# Altium PCB PCB_plata.PcbDoc
Units mm, origin at the board's own origin, x right, y up, seen from the top; angles counter-clockwise.
Board outline 115.57 x 101.6 mm, 2 copper layers (Top Layer, Bottom Layer); 56 components, 39 nets, 249 pads, 16 vias.
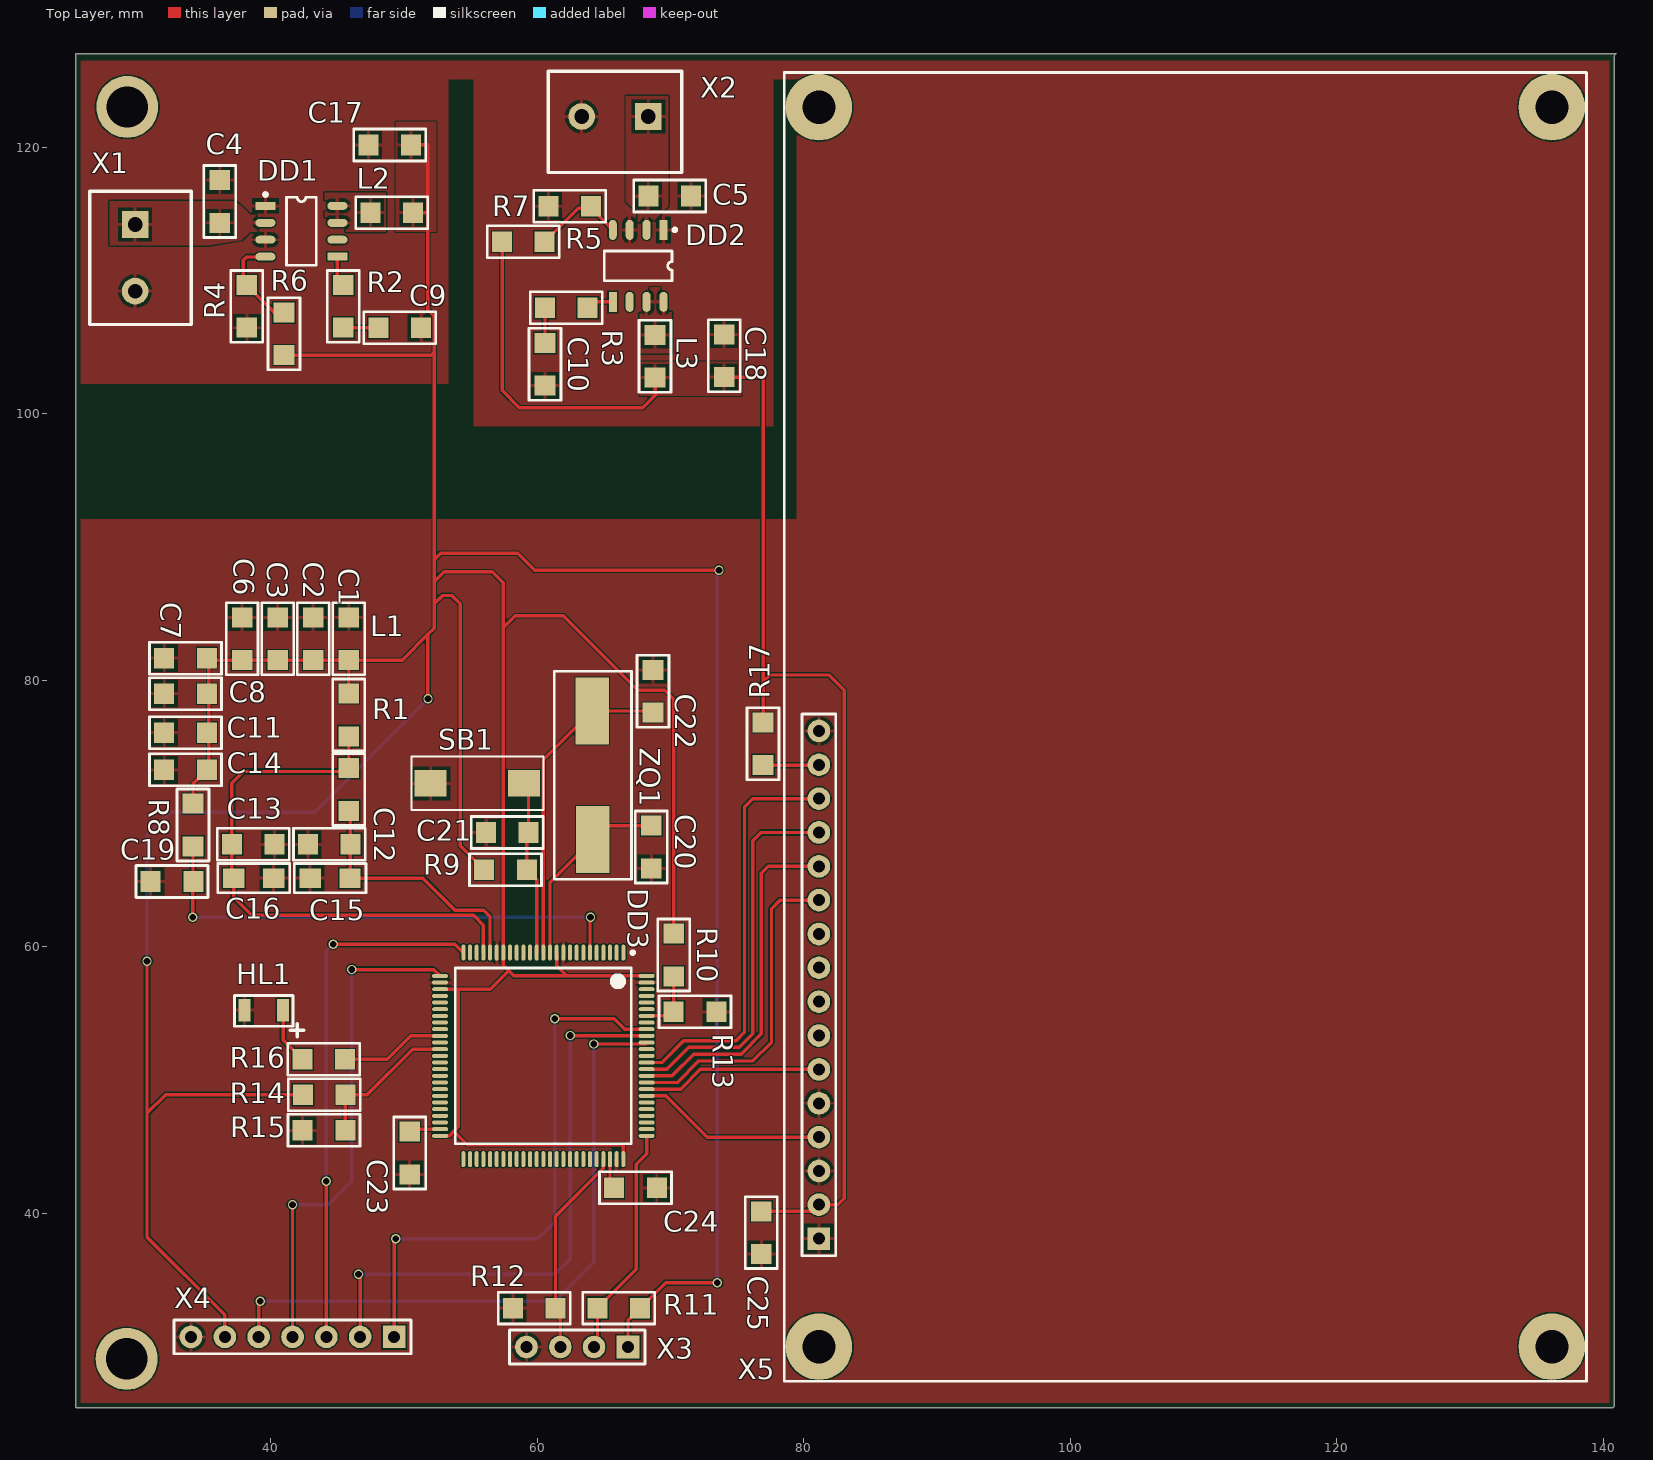
[diagram p0: Top Layer view]
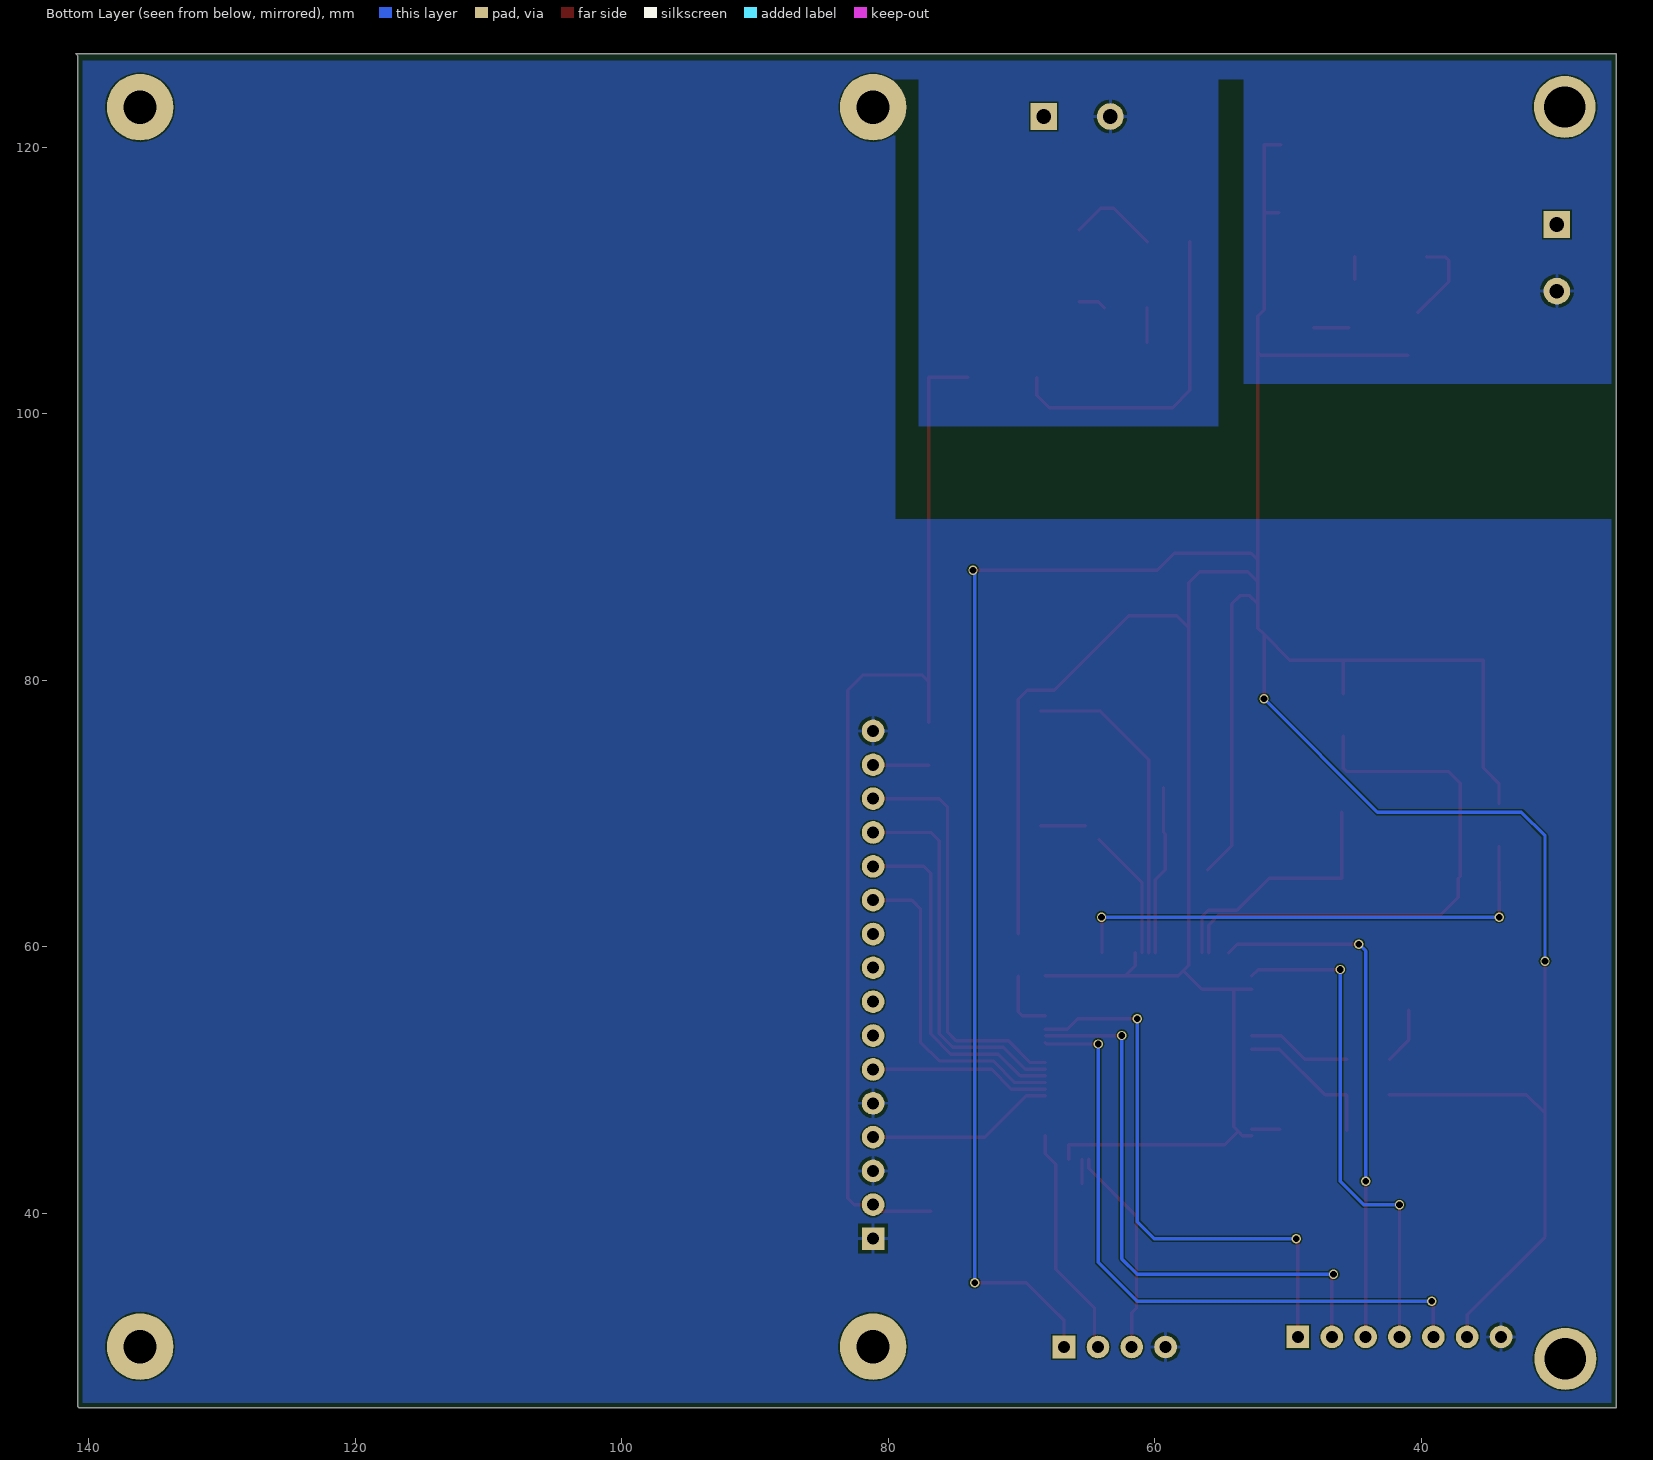
[diagram p1: Bottom Layer view, seen from below]
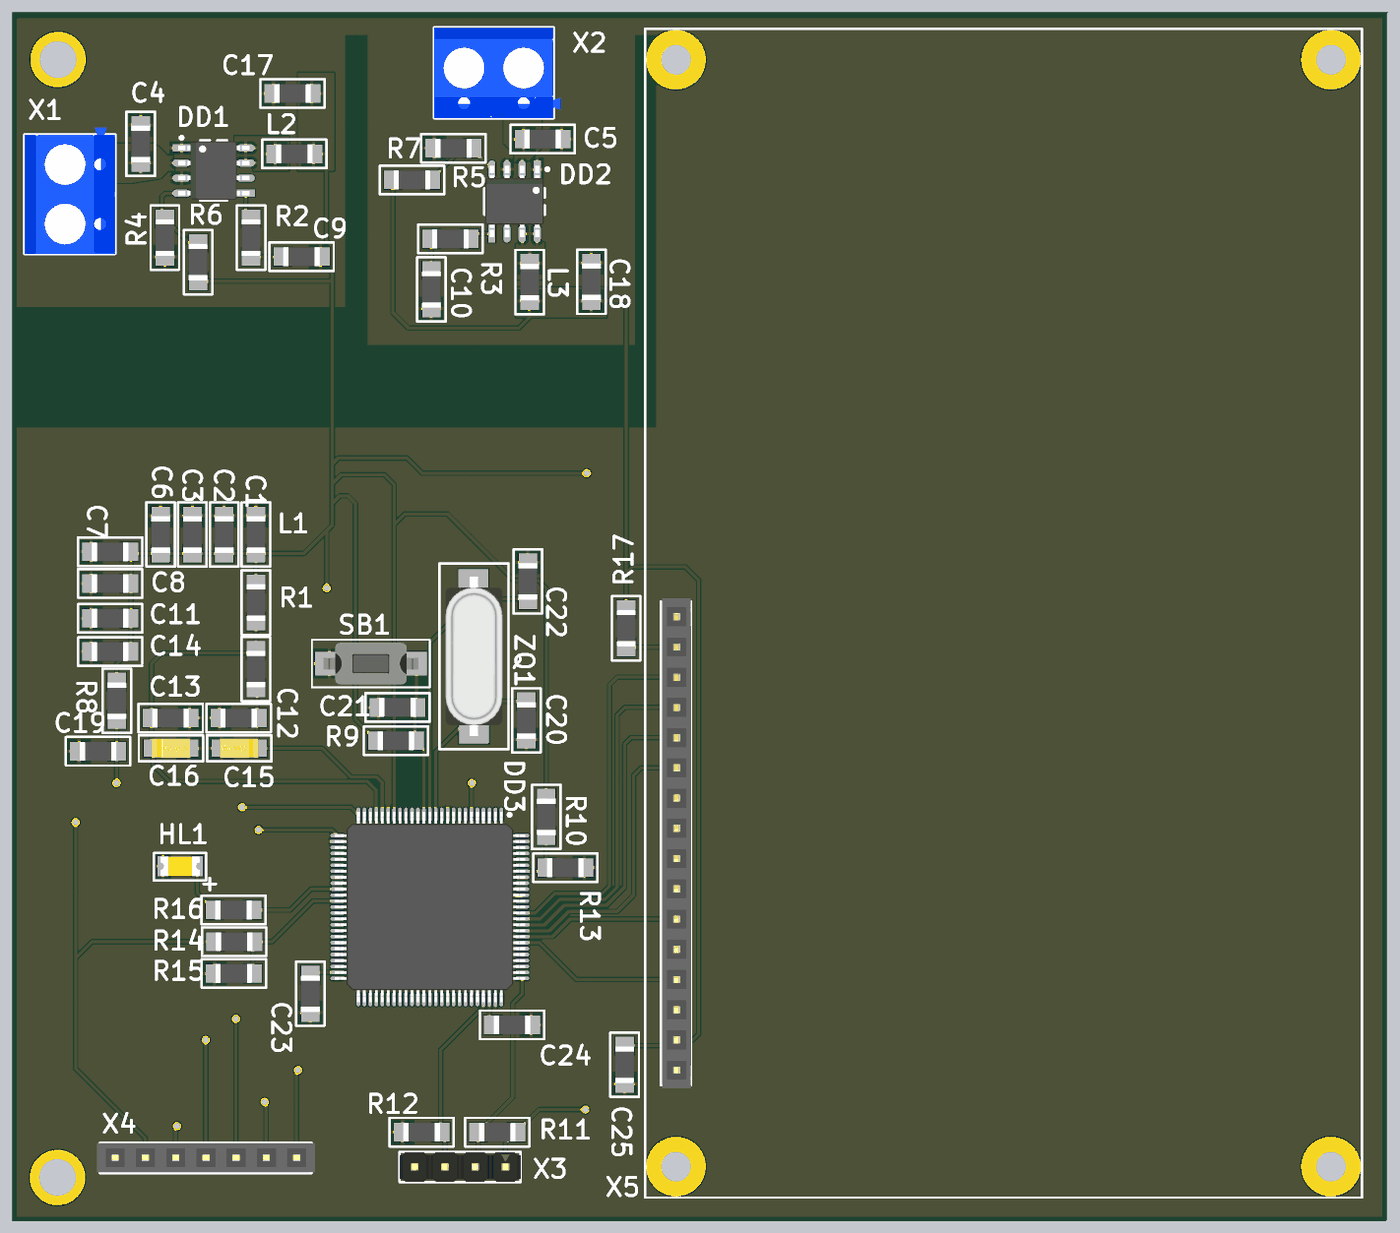
[diagram p2: 3D render of the assembled board from above, using the file's embedded part models]

## Layer stack, top to bottom
Top Solder: solder mask 0.0102, Solder Resist, Dk 3.5
Top Layer: signal copper 0.0356
Dielectric 1: dielectric 0.32, FR-4, Dk 4.8
Bottom Layer: signal copper 0.0356
Bottom Solder: solder mask 0.0102, Solder Resist, Dk 3.5

## Board outline
25.4,25.4 140.716,25.4 140.843,25.527 140.843,126.873 140.97,127 25.4,127

## Design rules (kind name [scope] priority, off if disabled: settings)
Clearance [All] p1: gap=0.1
HoleToHoleClearance [All] p1: gap=0.1 allowstackedmicrovias=TRUE
MinimumSolderMaskSliver [All] p1: minsoldermaskwidth=0.1
PolygonConnect [All] p1: connectstyle=Relief reliefconductorwidth=0.254 reliefentries=4 polygonreliefangle="90 Angle" airgapwidth=0.254
RoutingVias [All] p1: holewidth=0.5 width=0.7 viastyle="Through Hole" minholewidth=0.1 minwidth=0.5 maxholewidth=0.711 maxwidth=1.27
SilkToSilkClearance [All] p1: silktosilkclearance=0.1
SilkToSolderMaskClearance [IsPad] p1: minsilkscreentomaskgap=0.1 clearancetoexposedcopper=TRUE
SolderMaskExpansion [All] p1: expansion=0.05
UnpouredPolygon [All] p1: allowunpoured=FALSE
Width [All] p1: maxlimit=0.254 minlimit=0.1 preferedwidth=0.2
25 further rules are at their usual default settings.

## Components (designator, comment, footprint, x,y, rotation, side; value= is the part's Value field where it differs from the comment)
C1 "100nF" R1206 45.872,84.709 r270 top
C2 "C" R1206 43.205,84.709 r270 top
C3 "C" R1206 40.538,84.709 r270 top
C4 "2.2uF" R1206 36.195,114.325 r90 top
C5 "2.2uF" R1206 68.351,116.332 r0 top
C6 "C" R1206 37.871,84.709 r270 top
C7 "C" R1206 32.029,81.661 r0 top
C8 "C" R1206 32.029,78.994 r0 top
C9 "1.5nF" R1206 51.308,106.451 r180 top
C10 "1.5nF" R1206 60.604,102.108 r90 top
C11 "C" R1206 32.029,76.073 r0 top
C12 "1uF" R1206 42.824,67.691 r0 top
C13 "1uF" R1206 37.109,67.691 r0 top
C14 "C" R1206 32.029,73.279 r0 top
C15 "100nF" Rc3216 45.974,65.151 r180 top
C16 "100nF" Rc3216 37.236,65.151 r0 top
C17 "22uF" R1206 50.546,120.167 r180 top
C18 "22uF" R1206 74.041,102.743 r90 top
C19 "1uF" R1206 31.013,64.897 r0 top
C20 "20pF" R1206 68.58,65.888 r90 top
C21 "100nF" R1206 56.159,68.58 r0 top
C22 "20pF" R1206 68.707,80.772 r270 top
C23 "2.2uF" R1206 50.444,42.926 r90 top
C24 "2.2uF" R1206 68.986,41.91 r180 top
C25 "100nF" R1206 76.835,36.957 r90 top
DD1 "APW7142" APW7142 39.624,115.595 r0 top
DD2 "APW7142" APW7142 69.494,113.792 r270 top
DD3 "STM32F4" STM32F4xx 60.477,51.816 r270 top
HL1 "Led" LED 39.497,55.245 r180 top
L1 "4.7uH" R1206 45.872,78.994 r270 top
L2 "4.7uH" R1206 47.498,115.087 r0 top
L3 "6.8uH" R1206 68.859,105.918 r270 top
R1 "47" R1206 45.872,73.406 r270 top
R2 "10k" R1206 45.466,106.451 r90 top
R3 "10k" R1206 60.604,107.95 r0 top
R4 "15k" R1206 38.227,106.451 r90 top
R5 "12k" R1206 60.858,115.57 r0 top
R6 "46.9k" R1206 41.021,107.594 r270 top
R7 "63k" R1206 60.579,112.903 r180 top
R8 "Res" R1206 34.188,70.739 r270 top
R9 "100k" R1206 56.032,65.786 r0 top
R10 "Res" R1206 70.256,57.785 r90 top
R11 "Res" R1206 64.541,32.893 r0 top
R12 "Res" R1206 58.191,32.893 r0 top
R13 "Res" R1206 70.256,55.118 r0 top
R14 "Res" R1206 42.443,48.895 r0 top
R15 "Res" R1206 45.618,46.228 r180 top
R16 "Res" R1206 45.593,51.562 r180 top
R17 "100" R1206 76.962,76.835 r270 top
SB1 "BUTTON" RESET_BUTTON 55.524,72.263 r270 top
X1 "DG301" DG301 29.845,114.198 r270 top
X2 "DG301" DG301 68.351,122.301 r180 top
X3 "PLS-4" PLS4 66.827,29.972 r180 top
X4 "PBS-7" PBS7 49.276,30.734 r180 top
X5 "PBS16" PBS16 81.153,38.1 r90 top
ZQ1 "KR" HC-49SM 64.135,72.873 r270 top

## Footprints (in the part's own frame and the unit in brackets; to place one, negate y for a bottom-side part, rotate by r counter-clockwise, add the part's x,y. Pads: shape width x height; smd on the part's side, far side on the other; paste and mask are expansions set on the pad)
APW7142 [mm]
  rect 1.5x0.6 smd: 1(0,0) 5(5.4,-3.81)
  oval 1.5x0.6 smd: 2(0,-1.27) 3(0,-2.54) 4(0,-3.81) 6(5.4,-2.54) 7(5.4,-1.27) 8(5.4,0)
  silkscreen extent -0.12,-4.44 3.82,0.97, body extent -0.3,-4.35 5.7,0.55, height 1.75
DG301 [mm]
  rect 2x2 hole 1.1: 1(0,0)
  round 2 hole 1.1: 2(5,0)
  silkscreen extent -2.5,-3.4 7.5,4.2, body extent -3.1,-3.4 7.5,4.2, height 3.73
HC-49SM [mm]
  rect 5x2.5 smd: 1(-4.825,0) 2(4.825,0.05)
  silkscreen extent -7.8,-2.85 7.8,2.95, body extent -6.7,-2.35 6.7,2.45, height 4
LED [mm]
  rect 0.9x1.7 smd: 1(-1.45,0) 2(1.45,0)
  silkscreen extent -3,-1.1 2.2,2, body extent -1.65,-0.8 1.65,0.8, height 1.4
PBS7 [mm]
  rect 1.7x1.7 hole 0.9: 1(0,0)
  round 1.7 hole 0.9: 2(2.55,0) 3(5.08,0) 4(7.62,0) 5(10.16,0) 6(12.7,0) 7(15.24,0)
  silkscreen extent -1.28,-1.27 16.51,1.28, body extent -1.56,-1.24 16.76,1.22, height 8.48
PBS16 [mm]
  round 5 hole 2.5: 0(-8.1,0) 0(-8.1,-55) 0(84.9,-55) 0(84.9,0)
  rect 1.7x1.7 hole 0.9: 1(0,0)
  round 1.7 hole 0.9: 2(2.55,0) 3(5.08,0) 4(7.62,0) 5(10.16,0) 6(12.7,0) 7(15.24,0) 8(17.78,0) 9(20.33,0) 10(22.86,0) 11(25.4,0) 12(27.94,0) 13(30.48,0) 14(33.02,0) 15(35.56,0) 16(38.1,0)
  silkscreen extent -10.7,-57.6 87.5,2.6, body extent -1.54,-1.27 39.64,1.19, height 8.48
PLS4 [mm]
  rect 1.7x1.7 hole 0.9: 1(0,0)
  round 1.7 hole 0.9: 2(2.55,0) 3(5.08,0) 4(7.62,0)
  silkscreen extent -1.28,-1.27 8.89,1.28, body extent -1.27,-1.25 8.89,1.25, height 8.55
R1206 [mm]
  rect 1.5x1.55 smd: 1(0,0) 2(3.2,0)
  silkscreen extent -1.1,-1.2 4.3,1.2, body extent 0.05,-0.8 3.15,0.8, height 0.65
Rc3216 [mm]
  rect 1.6x1.45 smd: 1(0,0) 2(3,0)
  silkscreen extent -1.2,-1.1 4.2,1.1, body extent -0.1,-0.8 3.1,0.8, height 1.6
RESET_BUTTON [mm]
  rect 2x2.4 smd: 1(0,3.5) 2(0,-3.5)
  silkscreen extent -2,-4.95 2,4.95, body extent -1.75,-4 1.75,4, height 5.5
STM32F4xx [mm]
  oval 1.2x0.3 smd: 1(-7.75,6) 2(-7.75,5.5) 3(-7.75,5) 4(-7.75,4.5) 5(-7.75,4) 6(-7.75,3.5) 7(-7.75,3) 8(-7.75,2.5) 9(-7.75,2) 10(-7.75,1.5) 11(-7.75,1) 12(-7.75,0.5) 13(-7.75,0) 14(-7.75,-0.5) 15(-7.75,-1) 16(-7.75,-1.5) 17(-7.75,-2) 18(-7.75,-2.5) 19(-7.75,-3) 20(-7.75,-3.5) 21(-7.75,-4) 22(-7.75,-4.5) 23(-7.75,-5) 24(-7.75,-5.5) 25(-7.75,-6) 51(7.75,-6) 52(7.75,-5.5) 53(7.75,-5) 54(7.75,-4.5) 55(7.75,-4) 56(7.75,-3.5) 57(7.75,-3) 58(7.75,-2.5) 59(7.75,-2) 60(7.75,-1.5) 61(7.75,-1) 62(7.75,-0.5) 63(7.75,0) 64(7.75,0.5) 65(7.75,1) 66(7.75,1.5) 67(7.75,2) 68(7.75,2.5) 69(7.75,3) 70(7.75,3.5) 71(7.75,4) 72(7.75,4.5) 73(7.75,5) 74(7.75,5.5) 75(7.75,6)
  oval 0.3x1.2 smd: 26(-6,-7.75) 27(-5.5,-7.75) 28(-5,-7.75) 29(-4.5,-7.75) 30(-4,-7.75) 31(-3.5,-7.75) 32(-3,-7.75) 33(-2.5,-7.75) 34(-2,-7.75) 35(-1.5,-7.75) 36(-1,-7.75) 37(-0.5,-7.75) 38(0,-7.75) 39(0.5,-7.75) 40(1,-7.75) 41(1.5,-7.75) 42(2,-7.75) 43(2.5,-7.75) 44(3,-7.75) 45(3.5,-7.75) 46(4,-7.75) 47(4.5,-7.75) 48(5,-7.75) 49(5.5,-7.75) 50(6,-7.75) 76(6,7.75) 77(5.5,7.75) 78(5,7.75) 79(4.5,7.75) 80(4,7.75) 81(3.5,7.75) 82(3,7.75) 83(2.5,7.75) 84(2,7.75) 85(1.5,7.75) 86(1,7.75) 87(0.5,7.75) 88(0,7.75) 89(-0.5,7.75) 90(-1,7.75) 91(-1.5,7.75) 92(-2,7.75) 93(-2.5,7.75) 94(-3,7.75) 95(-3.5,7.75) 96(-4,7.75) 97(-4.5,7.75) 98(-5,7.75) 99(-5.5,7.75) 100(-6,7.75)
  silkscreen extent -7.87,-6.6 6.6,6.83, body extent -8,-8 8,8, height 1.59

## Part data
C1 C4 C5 C9 C10 C12 C13 C17 C18 C19 C20 C21 C22 C23 C24 C25: library part C
C15 C16: library part C+
L1 L2 L3: library part L
R1 R2 R3 R4 R5 R6 R7 R9 R17: library part Res
X5: library part Wh1602C

## Free pads (board coordinates)
  round 4.65 hole 3.1: 0(29.21,29.083) 0(29.254,123.016)

## Via types
v1: diameter 0.7, hole 0.5, Top Layer to Bottom Layer, 16 vias

## Nets (pads, with @x,y where several pads share a name; then routed paths per layer and width w, separated by ;. In a path a pad name is that pad's centre, name@x,y a point inside that pad or via, vN(x,y) a via of type N, cw(c..) or ccw(c..) an arc to the next point about the centre after c; other vN are vias at no path point)
3.3V: C1.2 C2.2 C3.2 C6.2 C7.2 C8.2 C11.2 C14.2 C17.1 DD3.11 DD3.19 DD3.28 DD3.50 DD3.75 DD3.100 L1.1 L2.2 R6.2 R8.1 R9.1 R10.2 R11.2 R14.1 X3.1 X4.6 | length 385.7
  Top Layer w0.254: v1(30.734,58.928) 30.734,47.498 ; R8.1 34.188,72.238 C14.2 35.381,73.431 35.381,81.509 C6.2 C3.2 C2.2 C1.2 ; X4.6 36.576,32.385 30.734,38.227 30.734,47.498 ; R6.2 52.07,104.394 52.285,104.609 ; R14.1 32.131,48.895 30.734,47.498 ; L1.1 C1.2 ; C17.1 51.791,120.167 51.791,115.087 ; L2.2 51.791,115.087 ; v1(51.816,78.613) 51.816,83.439 ; DD3.50 53.436,45.816 53.769,46.149 ; DD3.28 54.102,56.816 ; R9.1 54.229,67.589 54.229,85.725 53.594,86.36 52.92,86.36 52.285,85.725 ; DD3.11 61.477,58.569 62.23,57.816 ; DD3.75 66.477,45.156 54.762,45.156 53.769,46.149 ; X3.1 66.827,31.979 R11.2 69.646,34.798 v1(73.533,34.798) ; DD3.100 62.23,57.816 ; R10.2 70.256,78.588 69.596,79.248 67.564,79.248 61.976,84.836 58.366,84.836 57.477,83.947 ; v1(73.66,88.265) 59.817,88.265 58.547,89.535 52.793,89.535 52.285,89.027 ; C1.2 49.886,81.509 51.816,83.439 ; 51.791,115.087 51.791,107.814 52.285,107.32 52.285,104.609 ; 51.816,83.439 52.285,83.908 52.285,85.725 ; 52.285,85.725 52.285,87.376 ; 52.285,87.376 52.285,89.027 ; 52.285,87.376 53.047,88.138 56.642,88.138 57.477,87.303 57.477,83.947 ; 52.285,89.027 52.285,104.609 ; 53.769,46.149 54.102,46.482 54.102,56.816 ; 54.102,56.816 56.477,56.816 57.87,58.208 ; 57.477,83.947 DD3.19 57.477,58.601 57.87,58.208 ; 57.87,58.208 58.262,57.816 62.23,57.816
  Bottom Layer w0.254: v1(30.734,58.928) 30.734,68.326 32.512,70.104 43.307,70.104 v1(51.816,78.613) ; v1(73.533,34.798) v1@73.533,88.138
5V: C18.1 C25.2 L3.2 R7.2 R17.1 X5.2 | length 105.2
  Top Layer w0.254: R7.2 57.379,101.752 58.674,100.457 67.945,100.457 68.859,101.371 L3.2 ; C18.1 76.962,102.743 76.962,79.883 ; C25.2 80.66,40.157 X5.2 82.56,40.65 83.058,41.148 83.058,79.248 81.915,80.391 77.47,80.391 76.962,79.883 ; R17.1 76.962,79.883
AUX: DD3.90 X4.5 | length 49.2
  Top Layer w0.254: X4.5 v1@39.116,33.274 ; v1(64.262,52.705) 68.116,52.705 DD3.90
  Bottom Layer w0.254: v1(39.243,33.401) 61.341,33.401 64.262,36.322 v1(64.262,52.705)
BOOT0: DD3.94 R10.1 R13.1 | length 4.8
  Top Layer w0.254: DD3.94 69.954,54.816 R13.1 R10.1
BOOT1: DD3.37 R14.2 R15.1 | length 11.1
  Top Layer w0.254: R15.1 R14.2@45.618,48.87 ; R14.2 47.244,48.895 50.665,52.316 DD3.37
DB4: DD3.84 X5.11 | length 24.5
  Top Layer w0.254: DD3.84 70.517,49.816 72.136,51.435 76.2,51.435 77.597,52.832 77.597,62.865 78.232,63.5 X5.11
DB5: DD3.85 X5.12 | length 26.5
  Top Layer w0.254: DD3.85 70.128,50.316 71.755,51.943 75.311,51.943 76.835,53.467 76.835,65.532 77.343,66.04 X5.12
DB6: DD3.86 X5.13 | length 28.8
  Top Layer w0.254: DD3.86 69.739,50.816 71.374,52.451 75.184,52.451 76.2,53.467 76.2,67.945 76.835,68.58 X5.13
DB7: DD3.87 X5.14 | length 31
  Top Layer w0.254: DD3.87 69.35,51.316 70.993,52.959 74.93,52.959 75.565,53.594 75.565,70.485 76.2,71.12 X5.14
E: DD3.83 X5.6 | length 13.5
  Top Layer w0.254: DD3.83 70.779,49.316 72.263,50.8 X5.6
GND: C1.1 C2.1 C3.1 C4.2 C5.2 C6.1 C7.1 C8.1 C9.1 C10.1 C11.1 C12.1 C13.2 C14.1 C15.2 C16.2 C17.2 C18.2 C19.1 C20.1 C21.1 C22.1 C23.1 C24.1 C25.1 DD1.1 DD1.3 DD2.1 DD2.3 DD3.10 DD3.20 DD3.27 DD3.74 DD3.99 HL1.2 R4.1 R5.1 R12.1 R13.2 R15.2 SB1.2 X1.2 X2.2 X3.4 X4.7 X5.1 X5.3 X5.5 X5.16
LED: DD3.35 R16.1 | length 7.9
  Top Layer w0.254: R16.1 48.768,51.562 50.522,53.316 DD3.35
M0: DD3.92 X4.1 | length 42.2
  Top Layer w0.254: X4.1 v1@49.276,37.973 ; v1(61.341,54.61) 65.786,54.61 66.58,53.816 DD3.92
  Bottom Layer w0.254: v1(49.403,38.1) 60.071,38.1 61.341,39.37 v1(61.341,54.61)
M1: DD3.91 X4.2 | length 43.4
  Top Layer w0.254: X4.2 v1@46.726,35.316 ; v1(62.484,53.34) DD3.91@68.203,53.34
  Bottom Layer w0.254: v1(46.609,35.433) 61.341,35.433 62.484,36.576 v1(62.484,53.34)
NetC4_1: C4.1 DD1.2 X1.1
NetC5_1: C5.1 DD2.2 X2.1
NetC9_2: C9.2 R2.1 | length 2.6
  Top Layer w0.254: R2.1 C9.2
NetC10_2: C10.2 R3.1 | length 2.6
  Top Layer w0.254: C10.2 R3.1
NetC20_2: C20.2 DD3.12 ZQ1.2 | length 13.2
  Top Layer w0.254: DD3.12 60.977,64.84 ZQ1.2 ; ZQ1.2@65.225,69.088 C20.2
NetC21_2: C21.2 DD3.14 R9.2 SB1.1 | length 12.4
  Top Layer w0.254: R9.2 C21.2@59.232,68.453 ; R9.2@59.359,65.659 59.977,65.041 DD3.14 ; C21.2 SB1.1@59.359,71.928
NetC22_2: C22.2 DD3.13 ZQ1.1 | length 24.1
  Top Layer w0.254: DD3.13 60.477,74.04 ZQ1.1 C22.2@68.581,77.698
NetC23_2: C23.2 DD3.49 | length 2.1
  Top Layer w0.254: C23.2@50.634,46.316 DD3.49
NetC24_2: C24.2 DD3.73 | length 1.8
  Top Layer w0.254: C24.2@65.477,42.219 DD3.73
NetDD1_4: DD1.4 R4.2 R6.1 | length 6.6
  Top Layer w0.254: DD1.4 39.599,111.76 38.227,111.76 37.973,111.506 37.973,109.905 R4.2 R6.1@40.284,107.594
NetDD1_5: DD1.5 R2.2 | length 1.7
  Top Layer w0.254: R2.2@45.024,110.093 DD1.5
NetDD1_7: DD1.7 DD1.8 L2.1
NetDD2_4: DD2.4 R5.2 R7.1 | length 6.8
  Top Layer w0.254: R7.1 63.094,115.418 64.058,115.418 DD2.4
NetDD2_5: DD2.5 R3.2 | length 2.1
  Top Layer w0.254: R3.2 64.246,108.392 DD2.5
NetDD2_7: DD2.7 DD2.8 L3.1
NetHL1_1: HL1.1 R16.2 | length 4.3
  Top Layer w0.254: HL1.1 40.947,53.008 R16.2
NetR17_2: R17.2 X5.15 | length 4.2
  Top Layer w0.254: R17.2 X5.15@81.128,73.635
RS: DD3.82 X5.4 | length 14.2
  Top Layer w0.254: DD3.82 69.675,48.816 72.771,45.72 X5.4
RXD: DD3.25 X4.3 | length 39.7
  Top Layer w0.254: X4.3 v1(44.196,42.418) ; v1(44.704,60.198) 53.845,60.198 DD3.25
  Bottom Layer w0.254: v1(44.196,42.418) 44.196,59.69 v1(44.704,60.198)
SWCLK: DD3.76 R11.1 X3.2 | length 17.1
  Top Layer w0.254: X3.2@64.541,30.236 R11.1 64.541,32.918 67.437,35.814 67.437,43.688 68.227,44.478 DD3.76
SWDIO: DD3.72 R12.2 X3.3 | length 15.7
  Top Layer w0.254: X3.3 61.747,32.537 R12.2 61.391,39.801 64.977,43.387 DD3.72
TXD: DD3.26 X4.4 | length 37.8
  Top Layer w0.254: X4.4 v1(41.656,40.64) ; v1(46.101,58.293) 52.25,58.293 DD3.26
  Bottom Layer w0.254: v1(41.656,40.64) 44.323,40.64 46.101,42.418 v1(46.101,58.293)
VBAT: C19.2 DD3.6 R8.2 | length 37.8
  Top Layer w0.254: v1(34.163,62.23) C19.2@34.163,64.897 ; C19.2@34.188,64.922 R8.2 ; DD3.6 v1@63.977,62.199
  Bottom Layer w0.254: v1(34.163,62.23) v1(64.008,62.23)
VDDA: C13.1 C16.1 DD3.22 L1.2 R1.1 | length 41.7
  Top Layer w0.254: C16.1@37.109,65.278 C13.1 37.109,72.288 37.973,73.152 45.618,73.152 R1.1 L1.2 ; C16.1 37.236,63.729 38.608,62.357 55.245,62.357 55.977,61.625 DD3.22
VREF+: C12.2 C15.1 DD3.21 R1.2 | length 19.4
  Top Layer w0.254: R1.2@45.974,70.104 C15.1 51.435,65.151 53.848,62.738 56.007,62.738 56.477,62.268 DD3.21
pads on no net: DD1.6 DD2.6 DD3.1 DD3.2 DD3.3 DD3.4 DD3.5 DD3.7 DD3.8 DD3.9 DD3.15 DD3.16 DD3.17 DD3.18 DD3.23 DD3.24 DD3.29 DD3.30 DD3.31 DD3.32 DD3.33 DD3.34 DD3.36 DD3.38 DD3.39 DD3.40 DD3.41 DD3.42 DD3.43 DD3.44 DD3.45 DD3.46 DD3.47 DD3.48 DD3.51 DD3.52 DD3.53 DD3.54 DD3.55 DD3.56 DD3.57 DD3.58 DD3.59 DD3.60 DD3.61 DD3.62 DD3.63 DD3.64 DD3.65 DD3.66 DD3.67 DD3.68 DD3.69 DD3.70 DD3.71 DD3.77 DD3.78 DD3.79 DD3.80 DD3.81 DD3.88 DD3.89 DD3.93 DD3.95 DD3.96 DD3.97 DD3.98 X5.0 X5.7 X5.8 X5.9 X5.10

## Polygon pours and split planes (outlines as drawn)
NetC4_1 on Top Layer "V_IN" (solid, remove dead copper, pour order 16): 27.94,115.951 37.338,115.951 37.846,115.57 38.481,114.935 40.767,114.935 40.767,113.665 38.481,113.665 37.851,113.035 37.839,113.029 35.433,112.649 32.893,112.649 27.94,112.649 27.94,113.03 27.94,115.57
NetC5_1 on Top Layer "V_IN" (solid, remove dead copper, pour order 14): 69.85,123.825 69.85,116.459 69.85,115.697 69.85,115.57 68.834,114.554 68.834,112.649 67.564,112.649 67.564,114.681 67.564,115.062 66.929,115.697 66.675,115.951 66.675,123.825
5V on Top Layer "V_OUT" (solid, remove dead copper, pour order 12): 67.691,101.346 67.691,103.886 75.311,103.886 75.311,101.346
NetDD2_7 on Top Layer "V_LX" (solid, remove dead copper, pour order 11): 67.691,109.474 70.104,109.474 70.104,104.521 67.691,104.521
3.3V on Top Layer "V_OUT" (solid, remove dead copper, pour order 10): 49.403,113.665 52.451,113.665 52.451,121.92 49.403,121.92
NetDD1_7 on Top Layer "V_LX" (solid, remove dead copper, pour order 9): 44.069,116.586 44.069,113.665 48.641,113.665 48.641,116.586
GND on Top Layer "GND" (solid, remove dead copper, pour order 13): 140.462,126.619 140.462,25.781 25.781,25.781 25.781,92.075 79.502,92.075 79.502,125.095 77.724,125.095 77.724,99.06 55.245,99.06 55.245,125.095 53.34,125.095 53.34,102.235 25.781,102.235 25.781,126.619 25.907,126.493 140.462,126.493
GND on Bottom Layer "GND" (solid, remove dead copper, pour order 15): 140.462,126.492 140.462,25.781 25.781,25.781 25.781,92.075 79.502,92.075 79.502,125.095 77.724,125.095 77.724,99.06 55.245,99.06 55.245,125.095 53.34,125.095 53.34,102.235 25.781,102.235 25.781,126.492 140.462,126.492

## Silkscreen, mask and mechanical layers (free items; w line width, h text height)
Mechanical 1:
  lines w0.254: 140.843,126.873 140.843,25.527 140.716,25.4 25.4,25.4 25.4,127 140.843,127